# Altium PCB Grace.PcbDoc
Units mm, origin at the board's own origin, x right, y up, seen from the top; angles counter-clockwise.
Board outline 94 x 44.5 mm, 2 copper layers (Top Layer, Bottom Layer), stack 1.621 mm thick; 53 components, 21 nets, 166 pads, 34 vias.
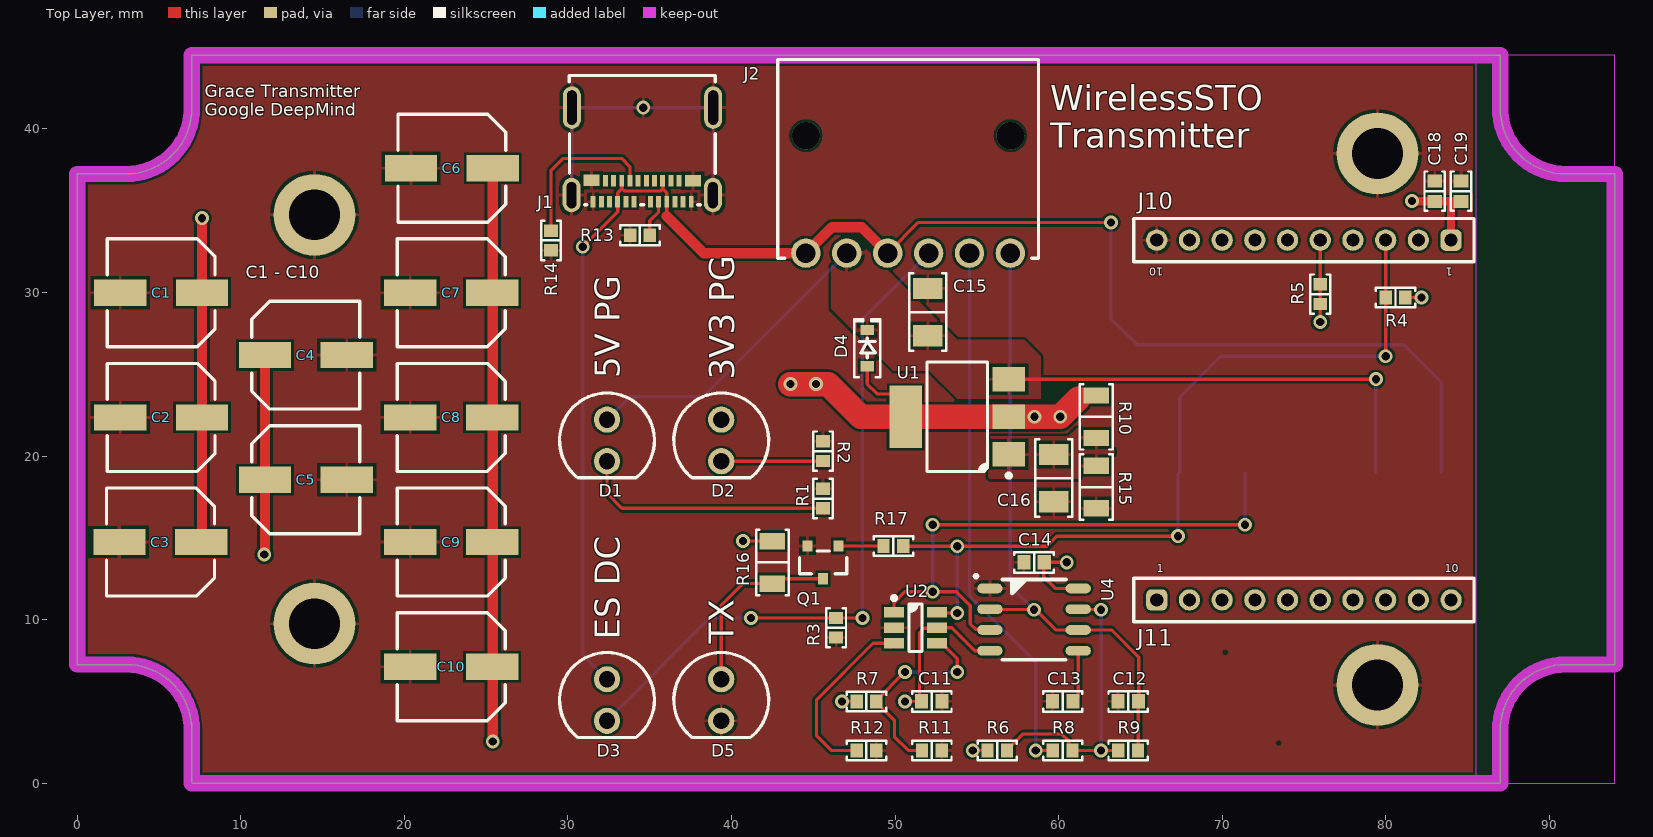
[diagram p0: Top Layer view]
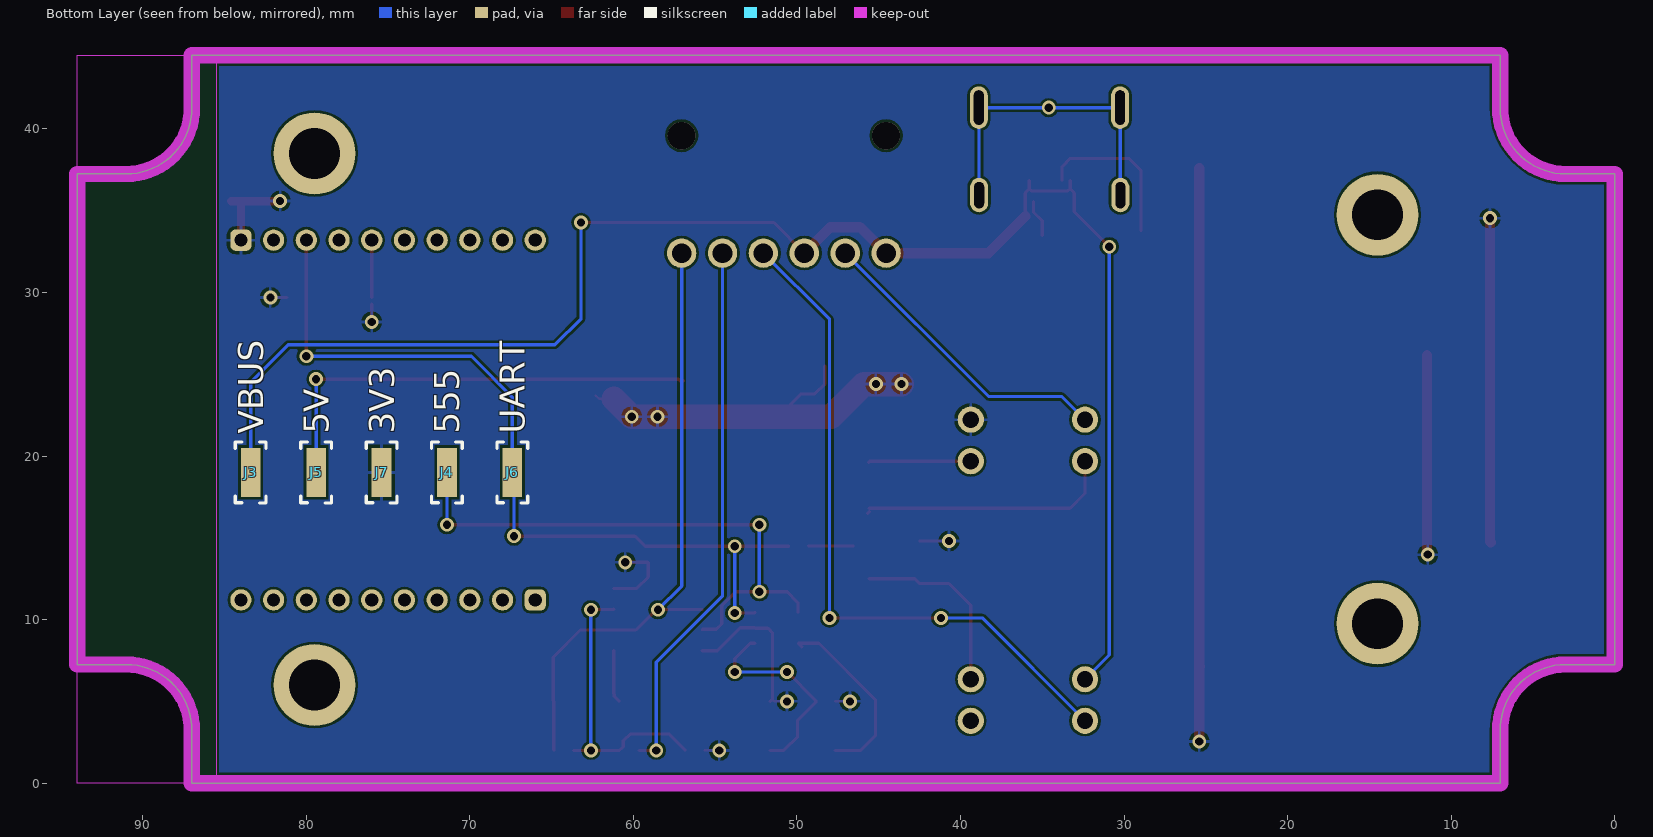
[diagram p1: Bottom Layer view, seen from below]
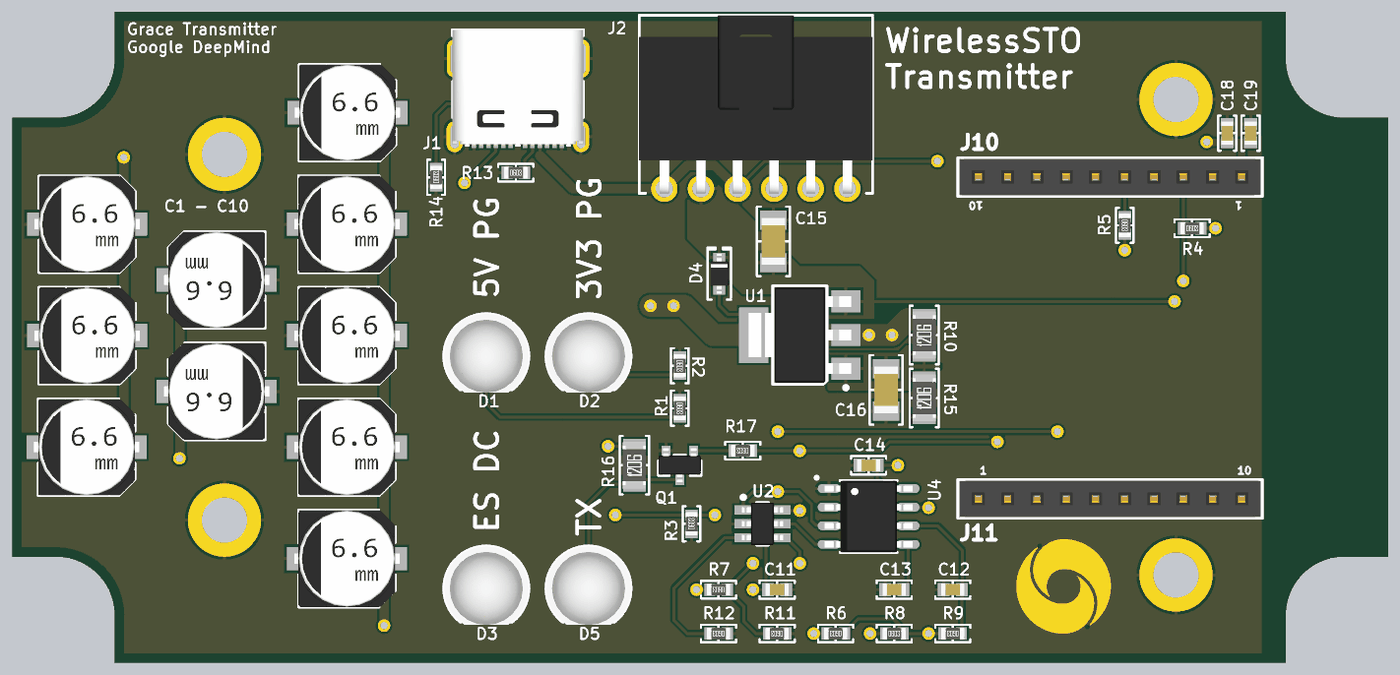
[diagram p2: 3D render of the assembled board from above, using the file's embedded part models]

## Layer stack, top to bottom
Top Solder: solder mask 0.0102, Solder Resist, Dk 3.5
Top Layer: signal copper 0.0356
Dielectric 1: dielectric 1.5494, FR-4, Dk 4.8
Bottom Layer: signal copper 0.0356
Bottom Solder: solder mask 0.0102, Solder Resist, Dk 3.5

## Board outline
0,7.25 3,7.25 cw(c3,3.25) 7,3.25 7,0 87,0 87,3.25 cw(c91,3.25) 91,7.25 94,7.25 94,37.25 91,37.25 cw(c91,41.25) 87,41.25 87,44.5 7,44.5 7,41.25 cw(c3,41.25) 3,37.25 0,37.25

## Design rules (kind name [scope] priority, off if disabled: settings)
BoardOutlineClearance [All] p1: gap=0.25 ignorepadtopadclearanceinfootprint=FALSE except(0: Arc-SplitContinuation Track-SplitContinuation SMDPad-SplitContinuation THPad-SplitContinuation Via-SplitContinuation Fill-SplitContinuation Poly-SplitContinuation Region-SplitContinuation Text-SplitContinuation)
Clearance Clearance-xPP-xTP-xTT [All] p1: gap=0.15 ignorepadtopadclearanceinfootprint=FALSE except(0: Arc-Hole Track-Hole SMDPad-Hole THPad-Hole Via-Hole Fill-Hole Poly-Hole Region-Hole Text-Hole)
ComponentClearance [All] p1: gap=0.25 collisioncheckmode=3 verticalgap=0.25 showdistances=FALSE
DiffPairsRouting [All] p1: maxlimit=0.25 minlimit=0.25 mostfreqgap=0.25 toplayer_minwidth=0.381 toplayer_maxwidth=0.381 toplayer_prefwidth=0.381 bottomlayer_minwidth=0.381 bottomlayer_maxwidth=0.381 bottomlayer_prefwidth=0.381 maxuncoupledlength=12.5
Height [All] p1: minheight=0 maxheight=25 prefheight=12.5
HoleSize HoleSize-PTH [All] p1: absolutevalues=TRUE maxlimit=2 minlimit=0.25 maxpercent=80.000 minpercent=20.000
HoleToHoleClearance [All] p1: gap=0.35 allowstackedmicrovias=TRUE
MinimumAnnularRing "Minimum IAR  >0.45mm" [((ObjectKind = 'Pad') OR (ObjectKind = 'Via')) And (Layer = 'MultiLayer') And (HoleDiameter > AsMM(0.45))] p1: minimumring=0.175 // minimum inner annular ring for pads > 0.45mm finished hole size
MinimumAnnularRing "Minimum IAR <=0.45mm" [((ObjectKind = 'Pad') OR (ObjectKind = 'Via')) And (Layer = 'MultiLayer') And (HoleDiameter <= AsMM(0.45))] p2: minimumring=0.175 // minimum inner annular ring for pads <= 0.45mm finished hole size
MinimumSolderMaskSliver [All] p1: minsoldermaskwidth=0.08
PlaneClearance PlaneClearance-IPI [All] p1: clearance=0.25
PlaneConnect [All] p1: planeconnectstyle=Relief reliefexpansion=0.175 reliefentries=4 reliefconductorwidth=0.2 reliefairgap=0.2
PolygonConnect PolygonConnect-xTW [All] p1: connectstyle=Relief reliefconductorwidth=0.2 reliefentries=4 polygonreliefangle="90 Angle" airgapwidth=0.2
RoomDefinition Grace [InComponentClass('Grace')] p1: confinementstyle=ConfineIn formatcopy=TRUE lockcomponents=FALSE outline 95.2,1.5 105.6,1.5 105.6,25.6 95.2,25.6
RoutingCorners [All] p1: cornerstyle=45-Degree minsetback=2.5 maxsetback=2.5
RoutingVias "RoutingVias > 0.45mm" [(ObjectKind = 'Via') And (HoleDiameter > AsMM(0.45))] p1: holewidth=0.5 width=0.85 viastyle="Through Hole" minholewidth=0.5 minwidth=0.85 maxholewidth=0.9 maxwidth=1.25 // finishet hole size > 0.45mm
RoutingVias "RoutingVias <= 0.45mm" [(ObjectKind = 'Via') And (HoleDiameter <= AsMM(0.45))] p2: holewidth=0.3 width=0.65 viastyle="Through Hole" minholewidth=0.25 minwidth=0.6 maxholewidth=0.45 maxwidth=0.8 // finishet hole size <= 0.45mm
SilkToSilkClearance [All] p1: silktosilkclearance=0.2
SilkToSolderMaskClearance SilkscreenOverComponentPads [IsPad] p1: minsilkscreentomaskgap=0.2 clearancetoexposedcopper=TRUE
SolderMaskExpansion [All] p1: expansion=0 istentingtop=FALSE
UnRoutedNet [All] p1: checkbadconnections=TRUE
Width Width-xTW [All] p1: maxlimit=1.5 minlimit=0.15 preferedwidth=0.2
18 further rules are at their usual default settings.

## Components (designator, comment, footprint, x,y, rotation, side; value= is the part's Value field where it differs from the comment)
C1 "220uF" "CAP ALSMD 6.6MM H7.7MM" 5.12,29.98 r180 top locked
C2 "220uF" "CAP ALSMD 6.6MM H7.7MM" 5.12,22.36 r180 top locked
C3 "220uF" "CAP ALSMD 6.6MM H7.7MM" 5.08,14.74 r180 top locked
C4 "220uF" "CAP ALSMD 6.6MM H7.7MM" 13.97,26.17 r0 top locked
C5 "220uF" "CAP ALSMD 6.6MM H7.7MM" 13.97,18.55 r0 top locked
C6 "220uF" "CAP ALSMD 6.6MM H7.7MM" 22.9,37.6 r180 top locked
C7 "220uF" "CAP ALSMD 6.6MM H7.7MM" 22.86,29.98 r180 top locked
C8 "220uF" "CAP ALSMD 6.6MM H7.7MM" 22.86,22.36 r180 top locked
C9 "220uF" "CAP ALSMD 6.6MM H7.7MM" 22.86,14.74 r180 top locked
C10 "220uF" "CAP ALSMD 6.6MM H7.7MM" 22.86,7.12 r180 top locked
C11 "100nF" "CAP 0603_1608 RF" 52.25,5 r180 top
C12 "1uF" "CAP 0603_1608 RF" 64.25,5 r0 top
C13 "100nF" "CAP 0603_1608 RF" 60.25,5 r0 top
C14 "100nF" "CAP 0603_1608 RF" 58.5,13.5 r0 top
C15 "10uF" "CAP 1206_3216" 52,28.8 r270 top
C16 "10uF" "CAP 1206_3216" 59.7,18.65 r90 top
C18 "100nF" "CAP 0603_1608 RF" 83,36.2 r270 top
C19 "47pF" "CAP 0603_1608 RF" 84.6,36.2 r270 top
D1 "HLMP-3507" "LED TH 5mm" 32.385,20.955 r270 top locked
D2 "HLMP-3507" "LED TH 5mm" 39.37,20.955 r270 top locked
D3 "HLMP-3301" "LED TH 5mm" 32.385,5.08 r270 top locked
D4 "1N4148WS-7-F" SOD323 48.3,26.6 r90 top
D5 "HLMP-3507" "LED TH 5mm" 39.37,5.08 r270 top locked
J1 "1054500101" "Molex 1054500101 - With Model" 34.54,36.2 r180 top
J2 "105313-1206" "MOLEX 1053131106" 50.8,38.608 r0 top locked
J3 "5015" FP-5015-MFG-RF 83.4,19 r270 bottom
J4 "5015" FP-5015-MFG-RF 71.4,19 r270 bottom
J5 "5015" FP-5015-MFG-RF 79.4,19 r270 bottom
J6 "5015" FP-5015-MFG-RF 67.4,19 r270 bottom
J7 "5015" FP-5015-MFG-RF 75.4,19 r270 bottom
J10 "62001011821" 62001011821 75,33.2 r180 top
J11 "62001011821" 62001011821 75,11.2 r0 top
Q1 "2N7002,215" "NEXPERIA SOT-23-3" 45.6,13.5 r270 top
R1 "560R" "RES 0603_1608 RF" 45.6,17.4 r270 top
R2 "240R" "RES 0603_1608 RF" 45.6,20.3 r270 top
R3 "330R" "RES 0603_1608 RF" 46.4,9.5 r90 top
R4 "10k" "RES 0603_1608 RF" 80.6,29.7 r0 top
R5 "10k" "RES 0603_1608 RF" 76,29.9 r270 top
R6 "10k" "RES 0603_1608 RF" 56.25,2 r180 top
R7 "180k" "RES 0603_1608 RF" 48.25,5 r180 top
R8 "1k" "RES 0603_1608 RF" 60.25,2 r0 top
R9 "680k" "RES 0603_1608 RF" 64.25,2 r180 top
R10 "120R" "RES 1206_3216 RF" 62.3,22.4 r90 top
R11 "1M" "RES 0603_1608 RF" 52.25,2 r180 top
R12 "732k" "RES 0603_1608 RF" 48.25,2 r180 top
R13 "5.1k" "RES 0603_1608 RF" 34.4,33.5 r0 top
R14 "5.1k" "RES 0603_1608 RF" 28.956,33.182 r90 top
R15 "200R" "RES 1206_3216 RF" 62.3,18.1 r90 top
R16 "120R" "RES 1206_3216 RF" 42.5,13.5 r90 top
R17 "1k" "RES 0603_1608 RF" 49.9,14.5 r180 top
U1 "TLV1117CDCY" "TI SOT-223 DCY" 53.8,22.4 r180 top
U2 "LTC6993CS6-1#TRMPBF" "LT TSOT-23-6 S6" 51.25,9.5 r0 top
U4 "TLC555CDR" "TI SOIC-8 D0008A" 58.5,10 r0 top

## Footprints (in the part's own frame and the unit in brackets; to place one, negate y for a bottom-side part, rotate by r counter-clockwise, add the part's x,y. Pads: shape width x height; smd on the part's side, far side on the other; paste and mask are expansions set on the pad)
62001011821 [mm] "Socket Header, Pitch 2.00 mm, THT, Vertical, single row, 10p"
  rrect50% 1.3x1.3 hole 0.8: 1(-9,0)
  round 1.3 hole 0.8: 2(-7,0) 3(-5,0) 4(-3,0) 5(-1,0) 6(1,0) 7(3,0) 8(5,0) 9(7,0) 10(9,0)
  silkscreen extent -10.4,-1.33 10.4,1.33, body extent -10.25,-1.25 10.25,1.25, height 4.35
"CAP 0603_1608 RF" [mm] "Chip Capacitor, 2-Leads, Body 1.60x0.80mm, IPC High Density"
  rect 0.8x0.9 smd: 1(-0.625,0) 2(0.625,0)
  silkscreen extent -1.2,-0.63 1.2,0.63, body extent -0.8,-0.41 0.8,0.41, height 0.82
"CAP 1206_3216" [mm] "Chip Capacitor, 2-Leads, Body 3.25x1.60mm, IPC Medium Density"
  rect 1.3x1.8 smd: 1(-1.45,0) 2(1.45,0)
  silkscreen extent -2.37,-1.12 2.37,1.12, body extent -1.6,-0.81 1.6,0.81, height 1.62
"CAP ALSMD 6.6MM H7.7MM" [mm] "Aluminum Electrolytic Capacitor, Body 6.60x6.60x7.70mm, IPC Low Density"
  rect 3.2x1.6 smd: 1(-2.5,0) 2(2.5,0)
  silkscreen extent -3.3,-3.3 3.3,3.3, body extent -3.6,-3.3 3.6,3.3, height 7.7
FP-5015-MFG-RF [mm]
  rect 3x1.2 smd paste+0 mask+0: 1(0,0)
  silkscreen extent -1.86,-0.94 1.87,0.94
"LED TH 5mm" [mm] "THT, LED-5mm, 2pin- Body 5.8mm"
  round 1.6 hole 1: 1(1.27,0) 2(-1.27,0)
  silkscreen extent -2.9,-2.9 2.29,2.9, body extent -2.9,-2.9 2.5,2.9, height 11.7
"LT TSOT-23-6 S6" [mm] "TSOT23, 6-Leads, Body 2.90x2.80mm, Pitch 0.95mm, IPC High Density, Reference LTC DWG # 05-08-1636"
  rect 1.22x0.62 smd: 1(-1.31,0.95) 2(-1.31,0) 3(-1.31,-0.95) 4(1.31,-0.95) 5(1.31,0) 6(1.31,0.95)
  silkscreen extent -1.43,-1.45 0.4,1.93, body extent -1.4,-1.45 1.4,1.45, height 1
"MOLEX 1053131106" [mm] "Connector Header Through Hole, Right Angle 6 position, 2mm Pitch, 15.94x8.64 mm Body"
  round 1.8 hole 1.2: 1(-6.25,-6.2) 2(-3.75,-6.2) 3(-1.25,-6.2) 4(1.25,-6.2) 5(3.75,-6.2) 6(6.25,-6.2)
  round 1.7 hole 1.7: SH(-6.25,0.98) SH(6.25,0.98)
  silkscreen extent -7.97,-6.52 7.97,5.64, body extent -7.97,-6.52 7.97,5.64, height 6.64
"Molex 1054500101 - With Model" [mm] "USB-C Receptacle Connector 24 Position Surface Mount, 24 Position, Body 8.94x7.90mm"
  oval 1.1x2.1 hole 1.6 slot 0.6 at 0 deg unplated: 1(-4.32,0.245) 2(4.32,0.245)
  oval 1.1x2.6 hole 2.1 slot 0.6 at 0 deg unplated: 3(4.3,-5.105) 4(-4.34,-5.105)
  rect 0.3x0.7 smd: A1(-3,0.655) A2(-2.5,0.655) A3(-2,0.655) A4(-1.5,0.655) A5(-1,0.655) A6(-0.5,0.655) A7(0.5,0.655) A8(1,0.655) A9(1.5,0.655) A10(2,0.655) A11(2.5,0.655) A12(3,0.655) B2(2.25,-0.645) B3(1.75,-0.645) B4(1.25,-0.645) B5(0.75,-0.645) B6(0.25,-0.645) B7(-0.25,-0.645) B8(-0.75,-0.645) B9(-1.25,-0.645) B10(-1.75,-0.645) B11(-2.25,-0.645)
  rect 1x0.7 smd: B1(3.1,-0.655) B12(-3.1,-0.645)
  silkscreen extent -4.47,-7.07 4.47,0.83, body extent -4.47,-7.07 4.47,0.83, height 3.21
"NEXPERIA SOT-23-3" [mm] "SOT23, 3-Leads, Body 2.90x2.40mm, Pitch 0.95mm, IPC Medium Density"
  rect 0.7x0.6 smd: 1(-1,0.95) 2(-1,-0.95) 3(1,0)
  silkscreen extent -0.7,-1.45 0.7,1.45, body extent -1.16,-1.45 1.16,1.45, height 1.5
"RES 0603_1608 RF" [mm] "Chip Resistor, 2-Leads, Body 1.60x0.80mm, IPC High Density"
  rect 0.75x0.85 smd: 1(-0.6,0) 2(0.6,0)
  silkscreen extent -1.2,-0.6 1.2,0.6, body extent -0.8,-0.4 0.8,0.4, height 0.45
"RES 1206_3216 RF" [mm] "Chip Resistor, 2-Leads, Body 3.13x1.55mm, IPC High Density"
  rect 1x1.55 smd: 1(-1.3,0) 2(1.3,0)
  silkscreen extent -2,-1 2,1, body extent -1.6,-0.8 1.6,0.8, height 0.6
SOD323 [mm] "SOD, 2-Leads, Body 1.25x2.50mm, IPC Medium Density"
  rect 0.625x0.83 smd: 1(-1.112,0) 2(1.112,0)
  silkscreen extent -1.78,-0.8 1.78,0.8, body extent -1.36,-0.62 1.36,0.62, height 1.05
"TI SOIC-8 D0008A" [mm] "Package SOIC-8, 8-Leades, 4.90 x 3.89 mm Body , Pitch 1.27 mm"
  oval 1.55x0.6 smd: 1(-2.7,1.905) 2(-2.7,0.635) 3(-2.7,-0.635) 4(-2.7,-1.905) 5(2.7,-1.905) 6(2.7,-0.635) 7(2.7,0.635) 8(2.7,1.905)
  silkscreen extent -3.65,-2.45 2.05,2.75, body extent -3,-2.45 3,2.45, height 1.75
"TI SOT-223 DCY" [mm] "SOT223, 4-Leads, Body 6.50x7.00mm (avg), Pitch 2.30mm, IPC Medium Density"
  rect 2x1.5 smd: 1(-3.15,2.3) 2(-3.15,0) 3(-3.15,-2.3)
  rect 2x3.8 smd: 4(3.15,0)
  silkscreen extent -3.27,-3.35 1.85,3.72, body extent -3.52,-3.25 3.5,3.25, height 1.8

## Part data
C1 C2 C3 C4 C5 C6 C7 C8 C9 C10: library part C_POL, "Polarised Capacitor", Tolerance=20%, Voltage Rating=10V, Capacitance=220uF, Diameter=6.3mm, Height=7.7mm
C11 C13 C14 C18: library part C, "Capacitor", Dielectric=X7R, Tolerance=20%, Voltage Rating=25V, Capacitance=100nF, Size Code=0603
C12: library part C, "Capacitor", Dielectric=X7R, Tolerance=20%, Voltage Rating=10V, Capacitance=1uF, Size Code=0603
C15 C16: library part C, "Generic Capacitor", Temperature Coefficient=X5R, Tolerance=10%, Voltage Rating=25V, Capacitance=10uF, Size Code=1206
C19: library part C, "Capacitor", Dielectric=C0G, Tolerance=20%, Voltage Rating=50V, Capacitance=47pF, Size Code=0603
D1 D2 D5: library part LED_TH5_GREEN, "Green 5mm TH LED, T-1 3/4, 10mA Ic, 2.1V", Case Size=5mm, Colour=Green, Forward Current=10mA, Forward Voltage=2.1V, Luminous Intensity=4.7mcd, Manufacturer Part Number=HLMP-3507, Wavelength=569nm
D3: library part LED_TH5_RED, "Red 5mm TH LED, T-1 3/4, 10mA Ic, 1.9V", Case Size=5mm, Colour=Red, Forward Current=10mA, Forward Voltage=1.9V, Luminous Intensity=6.1mcd, Manufacturer Part Number=HLMP-3301, Wavelength=626nm
D4: library part 1N4148, "Signal Diode VR=75V IF=150mA Trr=4ns P=200mW", Average Rectified Current=150mA, Capacitance=2pF, Forward Current=300mA, Forward Voltage=1.25V, Manufacturer=Diodes, Max Forward Surge Current (Ifsm)=2A, Max Operating Temperature=150°C, Max Repetitive Reverse Voltage (Vrrm)=75V, Max Reverse Current=1uA, Min Operating Temperature=-65°C, Package Quantity=3000, Power Dissipation=200mW, Supplier Part Number 1=9228070, Category="Rectifier Diodes", Colloquial=1N4148, Contact Plating=Tin,Matte, Current Rating=150mA, Element Configuration=Single, Height=1mm, Lead Free="Lead Free", Length=1.8mm, Manufacturer Part Number=1N4148WS-7-F, Max Reverse Voltage (DC)=75V, Max Surge Current=2A, Mount="Surface Mount", Number of Pins=2, Output Current=150mA, Packaging="Tape and Reel", Peak Non-Repetitive Surge Current=2A, Polarity=Standard, Power Rating=200mW, Pricing 1="3000=0.03600, 6000=0.03200, 12000=0.02900, 30000=0.02700, 60000=0.02300 (USD)", Radiation Hardening=No, REACH SVHC="No SVHC", Recovery Time=4ns, Reverse Recovery Time=4ns, Reverse Recovery Time-Max=4ns, RoHS=Yes, RoHS Compliant=Yes, Series=-, Stock 1=18000, Supplier 1=RSComponents, Voltage=75V, Voltage Rating (DC)=75V, Weight=0.000173oz, Width=1.4mm
J1: "Conn USB 3.1 Type C F 24 POS Solder RA SMD 24 Terminal 1 Port USB 3.1 T/R", Current Rating=0.25/1.25/5A, Manufacturer=Molex, Package=0, Temperature="-30°C to +85°C", Temperature Range High=+85°C, Temperature Range Low=-30°C, Voltage Rating=30V, Automotive=No, Category=Conn, ComponentLink2Description=Datasheet, ComponentLink2URL=https://www.molex.com/webdocs/datasheets/pdf/en-us/1054500101_IO_CONNECTORS.pdf, Conn Orientation="Right Angle", Contact Material=Gold,Nickel, Device Class L1=Connectors, Device Class L2="USB Connectors", Device Class L3=unset, Digikey Description="CONN RCP USB3.1 TYPEC 24P SMD RA", Footprint Url=https://www.molex.com/pdm_docs/sd/1054500101_sd.pdf, Height=3.44mm, Is Female=yes, Lead Free=Yes, Manufacturer Part Number=1054500101, Mouser Description="USB Shielded I/O Receptacle; Type C; Right Angle; Surface Mount; Gold over Nickel", Number of Contacts=24, Octopart=https://octopart.com/105450-0101-molex-68082325, Pitch=0.5mm, RoHS=TRUE, Shielding=true, Usb Standard="USB 3.1"
J2: library part "Nano-Fit RA TH 6 Way Header", "Nano-Fit Right Angle Header; Through Hole; 2.50mm; Single Row; 6 Circuit; Gold Plated", Color=Black, Manufacturer=Molex, Supplier Part Number 1=1225087, Category="Headers and Wire Housings", Colloquial="Nano-Fit RA TH", Contact Material=Brass, Contact Plating=Gold, Gender=Male, Manufacturer Part Number=105313-1206, Mount="Through Hole", Number of Rows=1, Pricing 1="10=1.38000 (GBP)", REACH SVHC=Unknown, RoHS=Yes, RoHS Compliant=Yes, Stock 1=621, Supplier 1=RSComponents, Termination="Through Hole"
J3 J4 J5 J6 J7: "PC TEST POINT MINIATURE", Manufacturer=keystone, Automotive=No, Category=Conn, ComponentLink2Description=Datasheet, ComponentLink2URL=http://www.keyelco.com/product-pdf.cfm?p=1353, Conn Orientation=Straight, Contact Material=Silver, Device Class L1=Connectors, Device Class L2=unset, Device Class L3=unset, Digikey Description="PC TEST POINT MINIATURE", Height=1.65mm, Lead Free=Yes, Manufacturer Part Number=5015, Number of Contacts=1, Octopart=https://octopart.com/5015-keystone-3822, Package=5015, RoHS=TRUE
J10 J11: library part CMP-1502-01210-2, Contact Resistance=20mΩ, Current Rating=2A, Operating Supply Voltage=250V, Gender=Female, Lead Pitch=2mm, NexarPartId=65162168, Number of Pins=10, Orientation=Vertical, RoHS=Non-Compliant
Q1: library part 2N7002, "MOSFET N-CH 60V 300MA SOT-23", Manufacturer=Nexperia, Category=MOSFETs, ComponentLink1Description=http://www.farnell.com/datasheets/1499179.pdf?src-supplier=Farnell, ComponentLink1URL=http://www.farnell.com/datasheets/1499179.pdf?src-supplier=Farnell, ComponentLink2Description=https://assets.nexperia.com/documents/data-sheet/BSS138PS.pdf?src-supplier=Digi-Key, ComponentLink2URL=https://assets.nexperia.com/documents/data-sheet/BSS138PS.pdf?src-supplier=Digi-Key, ComponentLink3Description=https://assets.nexperia.com/documents/data-sheet/2N7002.pdf?src-supplier=Digi-Key, ComponentLink3URL=https://assets.nexperia.com/documents/data-sheet/2N7002.pdf?src-supplier=Digi-Key, ComponentLink4Description=http://www.farnell.com/datasheets/1499179.pdf?src-supplier=Newark, ComponentLink4URL=http://www.farnell.com/datasheets/1499179.pdf?src-supplier=Newark, Manufacturer Part Number=2N7002,215, Pricing 1="3000=0.05700, 9000=0.05640, 24000=0.05590, 45000=0.05530 (USD)", RoHS=Yes, RoHS Compliant=Yes, Stock 1=243000, Supplier 1="Arrow Electronics", Supplier Part Number 1=2N7002,215
R1 R2 R3 R4 R5 R6 R7 R8 R9 R11 R12 R13 R14 R17: library part R, "Resistor", Power Rating=100mW, Temperature Coefficient=100ppm/°C, Tolerance=1%, Voltage Rating=75V, Size Code=0603
  R1: Resistance=560R
  R2: Resistance=240R
  R3: Resistance=330R
  R4 R5 R6: Resistance=10k
  R7: Resistance=180k
  R8 R17: Resistance=1k
  R9: Resistance=680k
  R11: Resistance=1M
  R12: Resistance=732k
  R13 R14: Resistance=5.1k
R10 R15 R16: library part R, "Resistor", Power Rating=250mW, Temperature Coefficient=100ppm/°C, Tolerance=1%, Voltage Rating=200V, Size Code=1206
  R10 R16: Resistance=120R
  R15: Resistance=200R
U1: "LV1117 type LDO Regulator Pos 1.25V to 13.7V 0.8A 4-Pin(3+Tab) SOT-223 Tube", Case/Package=SOT-223, Dropout Voltage=1.2V, Input Bias Current=5mA, Manufacturer="Texas Instruments", Max Input Voltage=15V, Max Operating Temperature=125°C, Max Output Current=800mA, Max Output Voltage=13.7V, Min Input Voltage=2.7V, Min Operating Temperature=-40°C, Min Output Voltage=1.238V, Output Voltage=13.75V, Package Quantity=80, Reference Voltage=1.262V, Supplier Part Number 1=296-26779-5-ND, Category="Voltage Regulators - Linear", Colloquial=LV1117, ComponentLink1Description=https://datasheet.ciiva.com/27050/825601-27050234.pdf?src-supplier=Jameco, ComponentLink1URL=https://datasheet.ciiva.com/27050/825601-27050234.pdf?src-supplier=Jameco, ComponentLink2Description=https://datasheet.ciiva.com/15111/getdatasheetpartid-67440-15111324.pdf?src-supplier=Verical, ComponentLink2URL=https://datasheet.ciiva.com/15111/getdatasheetpartid-67440-15111324.pdf?src-supplier=Verical, ComponentLink3Description=https://datasheet.ciiva.com/2062/tlv1117-2062013.pdf?src-supplier=Digi-Key, ComponentLink3URL=https://datasheet.ciiva.com/2062/tlv1117-2062013.pdf?src-supplier=Digi-Key, ComponentLink4Description=https://datasheet.ciiva.com/14275/tlv1117-15-14275165.pdf?src-supplier=Avnet, ComponentLink4URL=https://datasheet.ciiva.com/14275/tlv1117-15-14275165.pdf?src-supplier=Avnet, Height=1.6mm, Lead Free="Lead Free", Length=6.5mm, Manufacturer Part Number=TLV1117CDCY, Min Current Limit=800mA, Mount="Surface Mount", Number of Outputs=1, Number of Pins=4, Number of Regulators=1, Output Current=800mA, OUTPUT TYPE=Adjustable, Packaging=Rail/Tube, Polarity=Positive, Pricing 1="1=0.89000, 10=0.79400, 25=0.75400, 100=0.61930, 250=0.57888, 500=0.51156, 1000=0.40640 (USD)", Quiescent Current=5mA, Radiation Hardening=No, REACH SVHC="No SVHC", RoHS=Yes, RoHS Compliant=Yes, Series=-, Stock 1=1854, Supplier 1=Digi-Key, Width=3.5mm
U2: library part LTC6993-1, "TimerBlox: Monostable Pulse Generator (One Shot), 2.25 to 5.5 V, 0 to 70 degC, 6-Pin TSOT-23 (S6), RoHS, Tape and Reel", Manufacturer="Linear Technology", Temperature Range="0 to 70 degC", Colloquial=LTC6993-1, ComponentLink1Description="Manufacturer URL", ComponentLink1URL=http://www.linear.com/, ComponentLink2Description=Datasheet, ComponentLink2URL=http://cds.linear.com/docs/en/datasheet/69931234fb.pdf, ComponentLink3Description="Package Specification", ComponentLink3URL=http://cds.linear.com/docs/en/packaging/SOT_6_05-08-1636.pdf, DatasheetVersion="Rev. B", Mounting Technology="Surface Mount", PackageDescription="6-Pin Small Out-Line Transistor, Body 2.9 x 1.625 mm, Pitch 0.95 mm", PackageVersion=Jun-10, Packing="Tape and Reel", PartNumber=LTC6993CS6-1#TRMPBF, RoHS=TRUE, RSET="800 KOhm Max.", tWIDTH="5 ns Typ.", V+="2.25 to 5.5 V", VSET="0.97 to 1.03 V"
U4: "2.1-MHz, 250-µA, Low-Power Timer 8-SOIC 0 to 70", Case/Package=SOIC, Current Rating=250A, Frequency=2.1MHz, High Level Output Current=-10mA, Low Level Output Current=100mA, Max Operating Temperature=125°C, Max Power Dissipation=725mW, Max Supply Voltage=15V, Min Operating Temperature=-40°C, Min Supply Voltage=2V, Operating Supply Current=360uA, Package Quantity=2500, Quiescent Current=250uA, Supplier Part Number 1=3121208, Height=1.58mm, Lead Free="Lead Free", Length=4.9mm, Mount="Surface Mount", Number of Channels=1, Number of Pins=8, Number of Timers/Counters=1, Packaging="Tape and Reel", Power Dissipation=725mW, Radiation Hardening=No, REACH SVHC="No SVHC", Supplier 1=Farnell, Termination=SMD/SMT, Weight=0.002561oz, Width=3.91mm

## Free pads (board coordinates)
  round 5 hole 3.1 mask+0: 1(14.5,9.75) 1(14.5,34.75) 1(79.5,6) 1(79.5,38.5)

## Via types
v1: diameter 0.85, hole 0.5, Top Layer to Bottom Layer, 34 vias

## Nets (pads, with @x,y where several pads share a name; then routed paths per layer and width w, separated by ;. In a path a pad name is that pad's centre, name@x,y a point inside that pad or via, vN(x,y) a via of type N, cw(c..) or ccw(c..) an arc to the next point about the centre after c; other vN are vias at no path point)
3V3: C1.1 C2.1 C3.1 C4.1 C5.1 C6.1 C7.1 C8.1 C9.1 C10.1 C11.2 C14.2 C18.2 C19.2 D2.2 D4.1 J7.1 J10.1 R4.2 R5.2 R6.2 R7.2 R10.2 R16.2 U1.2 U1.4 U2.5 U4.4 U4.8 | length 117.6
  Top Layer w0.15: v1(46.75,5) R7.2 ; v1(50.6,5) 51.375,5 C11.2@51.5,5.125 ; v1(54.75,2) R6.2 ; 61.2,23.5 62.1,23.5 R10.2
  Top Layer w0.2: v1(40.7,14.8) R16.2 ; D4.1 48.3,24.4 48.9,23.8 49.75,23.8 50.65,22.9 U1.4 ; C11.2 51.5,5.125 51.5,9.208 51.767,9.475 52.535,9.475 U2.5 53.461,9.5 54.866,8.095 U4.4 ; v1(60.5,13.5) C14.2 59.1,13.475 59.1,12.6 59.795,11.905 U4.8 ; v1(76,28.2) R5.2 ; R4.2 v1(82.2,29.7) ; v1(81.6,35.6) v1@81.625,35.575
  Top Layer w0.5: v1@81.625,35.575 C18.2 84,35.575 ; J10.1 84,35.575 ; C19.2 84,35.575
  Top Layer w0.635: C3.1 7.62,14.78 C2.1 C1.1 v1(7.62,34.544) ; v1@11.47,14.033 C5.1 C4.1 ; v1(25.4,2.54) 25.4,7.08 C10.1 25.4,7.16 C6.1
  Top Layer w1.5: v1(43.6,24.4) v1(45.175,24.4) 45.9,24.4 47.9,22.4 U1.4 U1.2 v1(58.525,22.4) v1(60.1,22.4) 61.2,23.5
  other v1: 11.43,13.97
5V: C15.2 D1.2 D4.2 J2.2 J5.1 U1.3 | length 47.1
  Top Layer w0.2: U1.3@56.95,24.6 57.15,24.6 57.25,24.7 v1(79.4,24.7)
  Top Layer w1.5: J2.2@47.05,32.362 J2.2
  Bottom Layer w0.2: D1.2 33.8,23.64 38.282,23.64 J2.2 ; J5.1 v1(79.4,24.7)
555_OUT: J4.1 U2.1 U4.3 | length 34.7
  Top Layer w0.2: U2.1 49.94,11.04 50.6,11.7 53.755,11.7 54.6,10.855 54.6,9.73 54.92,9.409 55.756,9.409 U4.3 ; v1(52.3,15.8) v1(71.4,15.8)
  Bottom Layer w0.2: v1(52.3,11.7) v1(52.3,15.8) ; v1(71.4,15.8) J4.1
ESTOP2_COM: J2.5 R8.1 | length 33.1
  Top Layer w0.2: v1(58.6,2) R8.1
  Bottom Layer w0.2: J2.5 54.55,11.45 58.6,7.4 v1(58.6,2)
ESTOP2_NO: C12.2 J2.6 R9.1 U4.2 U4.6 | length 38.4
  Top Layer w0.2: U4.2 55.817,10.617 58.482,10.617 v1(58.5,10.6) 58.6,10.6 59.835,9.365 U4.6 63.235,9.365 64.9,7.7 64.9,5.025 C12.2 64.875,2.025 R9.1
  Bottom Layer w0.2: J2.6 57.05,12.05 v1(58.5,10.6)
GND: C1.2 C2.2 C3.2 C4.2 C5.2 C6.2 C7.2 C8.2 C9.2 C10.2 C11.1 C12.1 C13.1 C14.1 C15.1 C16.1 C18.1 C19.1 D5.1 J1.1 J1.2 J1.3 J1.4 J1.A1 J1.A12 J1.B1 J1.B12 J10.10 pad.1 Q1.2 R1.1 R2.1 R3.1 R11.1 R12.1 R13.1 R14.1 R15.1 U2.2 U4.1 | length 20.8
  Bottom Layer w0.2: J1.2@30.22,36.956 30.23,36.966 30.23,42.296 30.23,41.726 30.656,41.3 38.464,41.3 38.87,41.706 38.87,42.296 38.87,36.966 J1.1@38.86,36.956
  other v1: 34.6,41.3
LED_BYPASS: D3.1 J2.4 R3.2 | length 42.1
  Top Layer w0.2: v1(41.2,10.1) R3.2@46.375,10.1 ; R3.2 v1(48,10.1)
  Bottom Layer w0.2: D3.1 38.675,10.1 v1(41.2,10.1) ; v1@48.006,10.16 48.006,28.364 J2.4
LTC_UART: J6.1 J10.3 R4.1 R17.1 U2.6 | length 51.7
  Top Layer w0.2: R17.1 50.514,14.486 59.286,14.486 59.9,15.1 v1(67.3,15.1) ; U2.6 52.61,10.4 v1(53.8,10.4) ; v1(80,26.1) J10.3@80,33.25
  Bottom Layer w0.2: v1(53.8,10.4) v1(53.8,14.486) ; v1(67.3,15.1) 67.3,18.9 J6.1 67.4,23.6 69.9,26.1 v1(80,26.1)
NetC13_2: C13.2 U4.5 | length 3.2
  Top Layer w0.2: C13.2 61.175,5.3 61.175,5.442 61.2,5.467 U4.5
NetC16_2: C16.2 R10.1 R15.2 U1.1
NetD1_1: D1.1 R1.2 | length 15.7
  Top Layer w0.2: D1.1 32.385,17.715 33.3,16.8 R1.2 ; R1.2@45.575,16.6 R1.2@45.675,16.5
NetD2_1: D2.1 R2.2 | length 6.3
  Top Layer w0.2: D2.1 45.555,19.685 R2.2@45.62,19.62
NetD5_2: D5.2 Q1.3 R16.1 | length 11.4
  Top Layer w0.2: D5.2 39.37,10.87 40.7,12.2 R16.1 42.8,12.5 Q1.3
  Bottom Layer w0.2: D5.2 D5.2@39.385,6.365
NetJ1_A5: J1.A5 R13.2 | length 2.3
  Top Layer w0.2: R13.2 35,34.383 35.54,34.923 J1.A5
NetJ1_B5: J1.B5 R14.2 | length 9.9
  Top Layer w0.2: R14.2 28.956,37.456 29.7,38.2 33.28,38.2 33.79,37.69 J1.B5
NetJ10_5: J10.5 R5.1 | length 3.6
  Top Layer w0.2: 76,29.7 J10.5@76,33.25
NetQ1_1: Q1.1 R17.2 | length 2.7
  Top Layer w0.2: Q1.1 R17.2
NetR6_1: R6.1 R8.2 R9.2 U4.7 | length 17.9
  Top Layer w0.2: R6.1 56.85,2.05 57.8,3 60.2,3 60.613,2.587 60.613,2.237 R8.2 v1(62.6,2) R9.2 ; U4.7 61.217,10.617 62.582,10.617 v1(62.6,10.6)
  Bottom Layer w0.2: v1(62.6,2) v1(62.6,10.6)
NetR7_1: R7.1 R11.2 U2.4 | length 12.8
  Top Layer w0.2: v1(50.6,6.8) 48.85,5.05 R7.1 48.85,4.95 49.962,3.837 49.962,2.838 50.8,2 R11.2 ; U2.4 52.86,8.55 53.8,7.61 v1(53.8,6.8)
  Bottom Layer w0.2: v1(50.6,6.8) v1(53.8,6.8)
NetR12_2: R12.2 U2.3 | length 11.5
  Top Layer w0.2: R12.2 46.1,2 45.2,2.9 45.2,5.1 48.65,8.55 49.91,8.55 U2.3@49.7,8.34
VBUS: D3.2 J1.A4 J1.A9 J1.B4 J1.B9 J2.1 J2.3 J3.1 | length 100.4
  Top Layer w0.2: v1(30.9,32.8) 33.04,34.94 J1.A9 33.04,36.09 33.295,36.345 ; J1.B4 33.295,36.84 33.295,36.345 ; J1.B9 35.8,36.835 35.8,36.33 ; 36.04,34.66 J1.A4 36.04,36.09 35.8,36.33 ; J2.3 51.428,34.286 v1(63.2,34.286) ; 33.295,36.345 33.427,36.213 35.683,36.213 35.8,36.33
  Top Layer w0.635: 36.04,34.66 38.292,32.408 J2.1 46.142,34 47.958,34 J2.3
  Bottom Layer w0.2: v1(30.9,32.8) 30.9,7.835 D3.2 ; v1(63.2,34.286) 63.2,28.4 64.8,26.8 81.1,26.8 83.4,24.5 J3.1
pads on no net: J1.A2 J1.A3 J1.A6 J1.A7 J1.A8 J1.A10 J1.A11 J1.B2 J1.B3 J1.B6 J1.B7 J1.B8 J1.B10 J1.B11 J2.SH J10.2 J10.4 J10.6 J10.7 J10.8 J10.9 J11.1 J11.2 J11.3 J11.4 J11.5 J11.6 J11.7 J11.8 J11.9 J11.10

## Polygon pours and split planes (outlines as drawn)
GND on Top Layer "TOP_GND" (solid, pour order 3): 0,7.25 3,7.25 cw(c3,3.25) 7,3.25 7,0 87,0 87,3.25 cw(c91,3.25) 91,7.25 94,7.25 94,37.25 91,37.25 cw(c91,41.25) 87,41.25 87,44.5 7,44.5 7,41.25 cw(c3,41.25) 3,37.25 0,37.25
5V on Top Layer "Regulator_IN" (solid, remove dead copper, pour order 0): 46.1,29 49.9,25.2 52.1,25.2 53.8,23.5 58.9,23.5 58.9,26.1 57.9,27.1 53.8,27.1 47.5,33.4 46.7,33.4 46.1,32.8
NetC16_2 on Top Layer "Regulator_ADJ" (solid, remove dead copper, pour order 2): 63.4,21.7 61.1,21.7 60.6,21.2 55.7,21.2 55.7,18.7 55.8,18.6 63.3,18.6 63.4,18.7
3V3 on Bottom Layer "BOT_3V3" (solid, pour order 1): 0,7.25 3,7.25 cw(c3,3.25) 7,3.25 7,0 87,0 87,3.25 cw(c91,3.25) 91,7.25 94,7.25 94,37.25 91,37.25 cw(c91,41.25) 87,41.25 87,44.5 7,44.5 7,41.25 cw(c3,41.25) 3,37.25 0,37.25

## Keep-outs
Keep-Out Layer:
  region: 94,0 94,44.5 85.5,44.5 85.5,0
  lines w1: 0,7.25 0,37.25 3,37.25 ccw(c3,41.25) 7,41.25 7,44.5 87,44.5 87,41.25 ccw(c91,41.25) 91,37.25 94,37.25 94,7.25 91,7.25 ccw(c91,3.25) 87,3.25 87,0 7,0 7,3.25 ccw(c3,3.25) 3,7.25 0,7.25

## Other copper
Top Layer:
  region: 70.197,7.991 70.186,7.991 70.186,8.002 70.197,8.002
  region: 73.444,2.433 73.444,2.444 73.455,2.444 73.455,2.433

## Silkscreen, mask and mechanical layers (free items; w line width, h text height)
Top Overlay:
  text "Grace Transmitter / Google DeepMind" at 7.8,40.8 h0.76
  text "WirelessSTO / Transmitter" at 59.5,38.865 h1.52
  text "C1 - C10" at 10.287,30.861 h0.76
  text "5V PG" at 33.162,24.754 h1.52 r90
  text "3V3 PG" at 40.162,24.654 h1.52 r90
  text "ES DC" at 33.162,8.754 h1.52 r90
  text "TX" at 40.132,8.509 h1.52 r90
Bottom Overlay:
  text "UART" at 66.638,21.354 h1.52 r270
  text "555" at 70.638,21.354 h1.52 r270
  text "3V3" at 74.638,21.354 h1.52 r270
  text "5V" at 78.638,21.354 h1.52 r270
  text "VBUS" at 82.638,21.354 h1.52 r270
Top Solder:
  drawing of 4 lines, arcs and shapes, not listed
Bottom Solder:
  region: 21.717,28.916 21.743,28.916 21.743,28.942 21.717,28.942
  region: 13.951,15.62 13.951,15.646 13.925,15.646 13.925,15.62
Mechanical 1:
  circle w0.013: c14.5,9.75 r1.75
  circle w0.013: c79.5,38.5 r1.75
  circle w0.013: c79.5,6 r1.75
  circle w0.013: c14.5,34.75 r1.75
  lines w0.013: 0,7.25 3,7.25 cw(c3,3.25) 7,3.25 7,0 87,0 87,3.25 cw(c91,3.25) 91,7.25 94,7.25 94,37.25 91,37.25 cw(c91,41.25) 87,41.25 87,44.5 7,44.5 7,41.25 cw(c3,41.25) 3,37.25 0,37.25 0,7.25

## Text inside footprints (layer, text, board x,y; h text height)
D1: Mechanical 15 "K" at 32.004,17.907 h0.76 r270
D2: Mechanical 15 "K" at 38.989,17.907 h0.76 r270
D3: Mechanical 15 "K" at 32.004,2.032 h0.76 r270
D5: Mechanical 15 "K" at 38.989,2.032 h0.76 r270
J10: Top Overlay "1" at 84.1,31.5 h0.5 r180; Top Overlay "10" at 66.4,31.5 h0.5 r180
J11: Top Overlay "1" at 66,12.9 h0.5; Top Overlay "10" at 83.6,12.9 h0.5